# Altium PCB cProject.PcbDoc
Units mm, origin at the board's own origin, x right, y up, seen from the top; angles counter-clockwise.
Board outline 103.1 x 119.4 mm, 2 copper layers (Top Layer, Bottom Layer); 22 components, 9 nets, 45 pads, 0 vias.
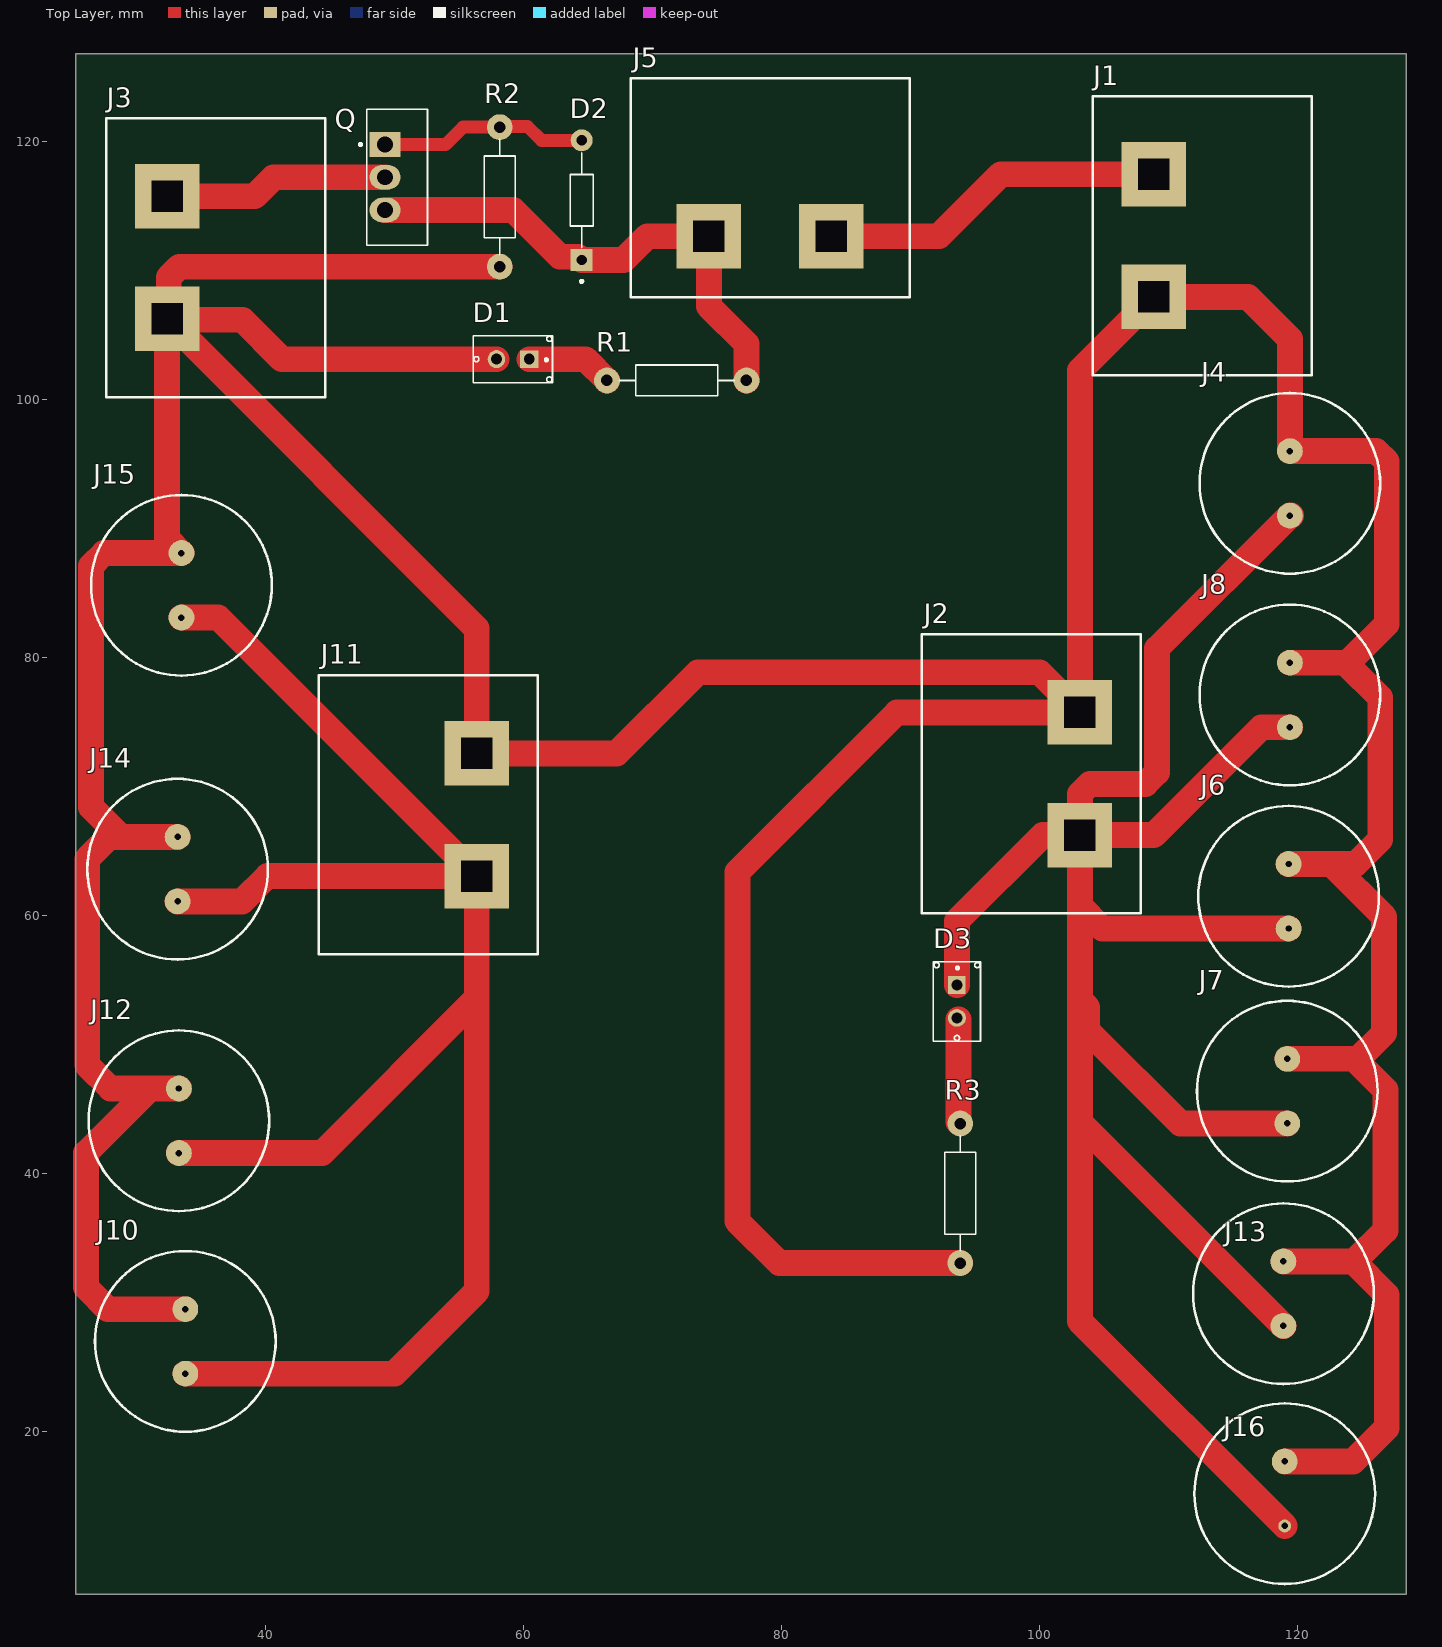
[diagram p0: Top Layer view]
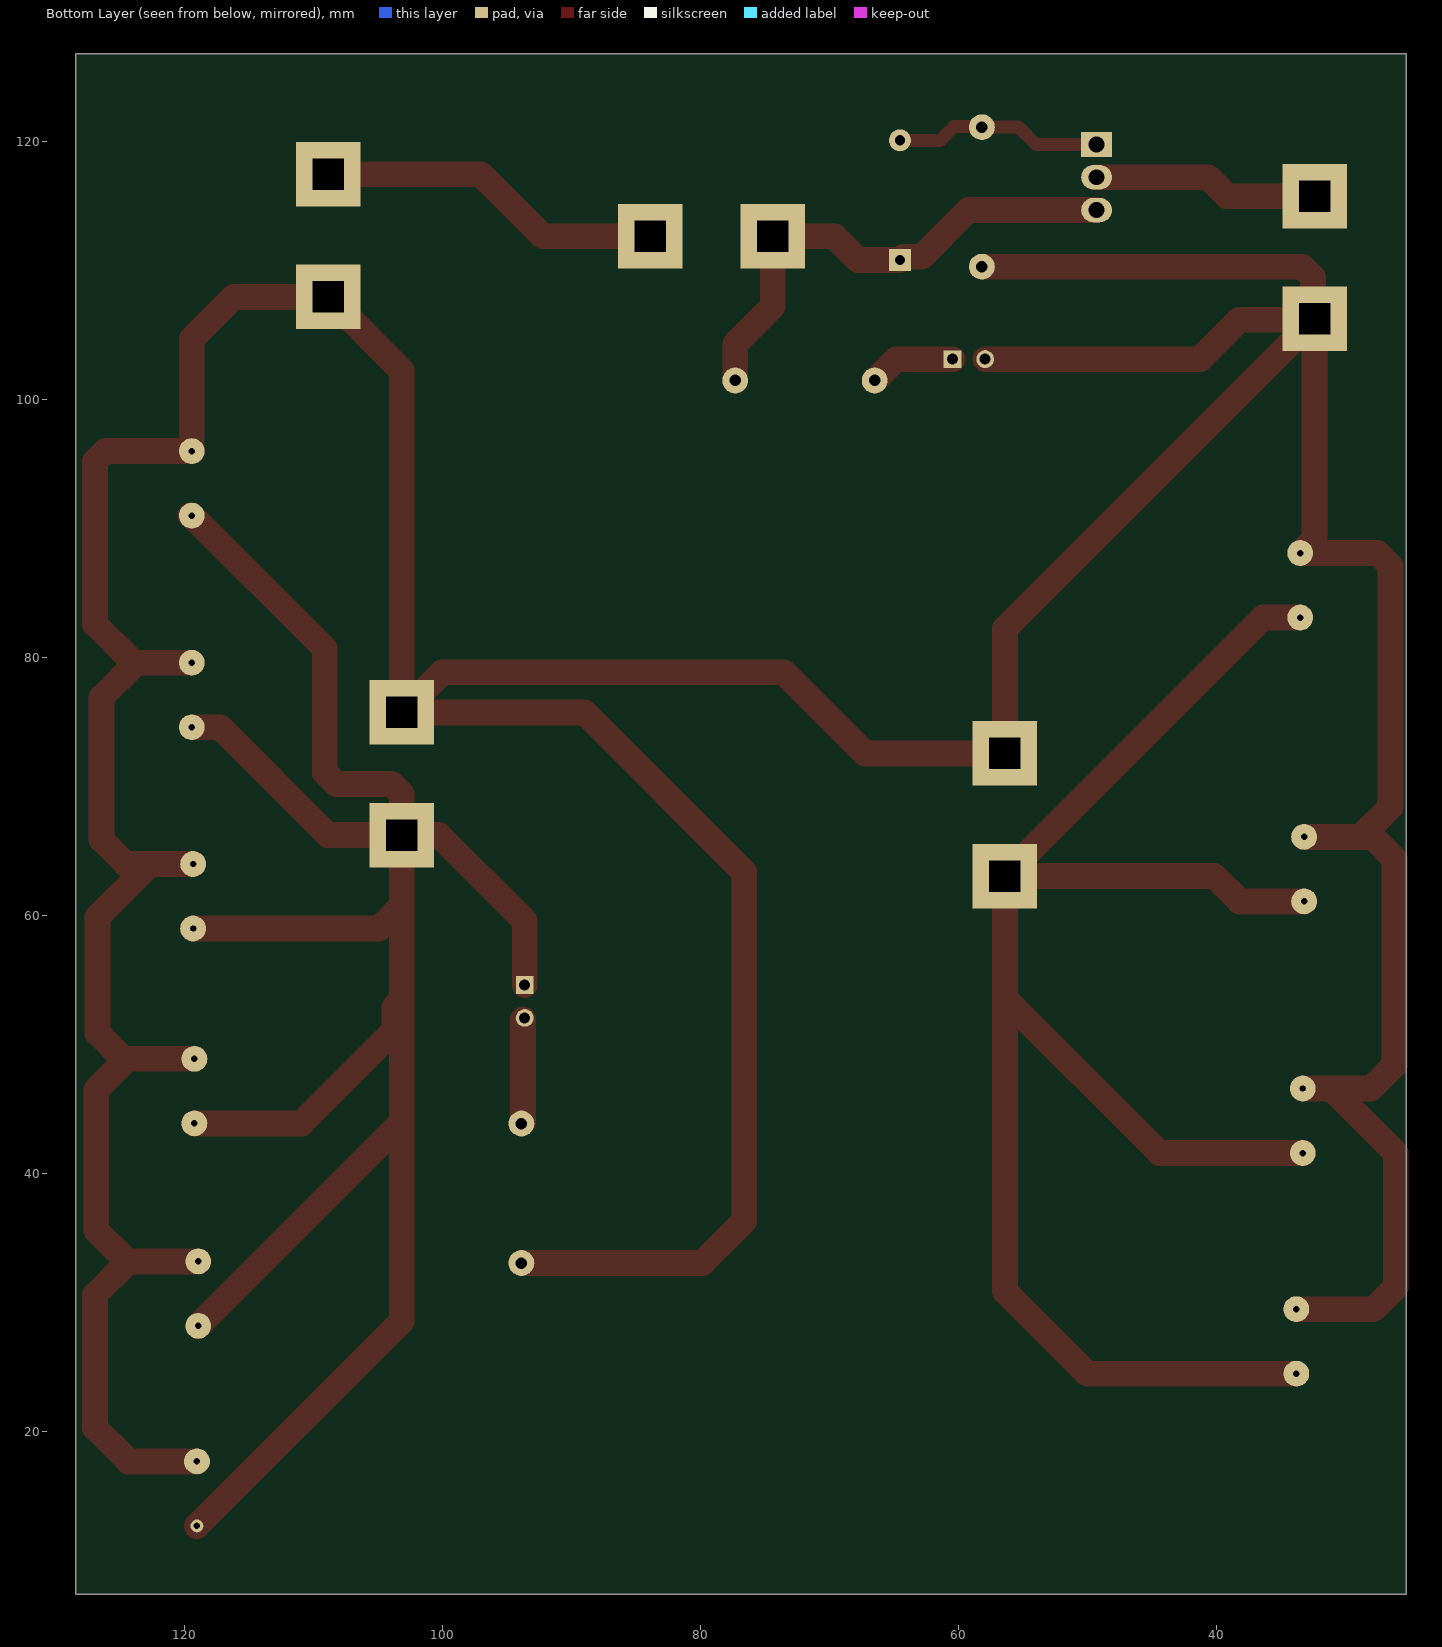
[diagram p1: Bottom Layer view, seen from below]
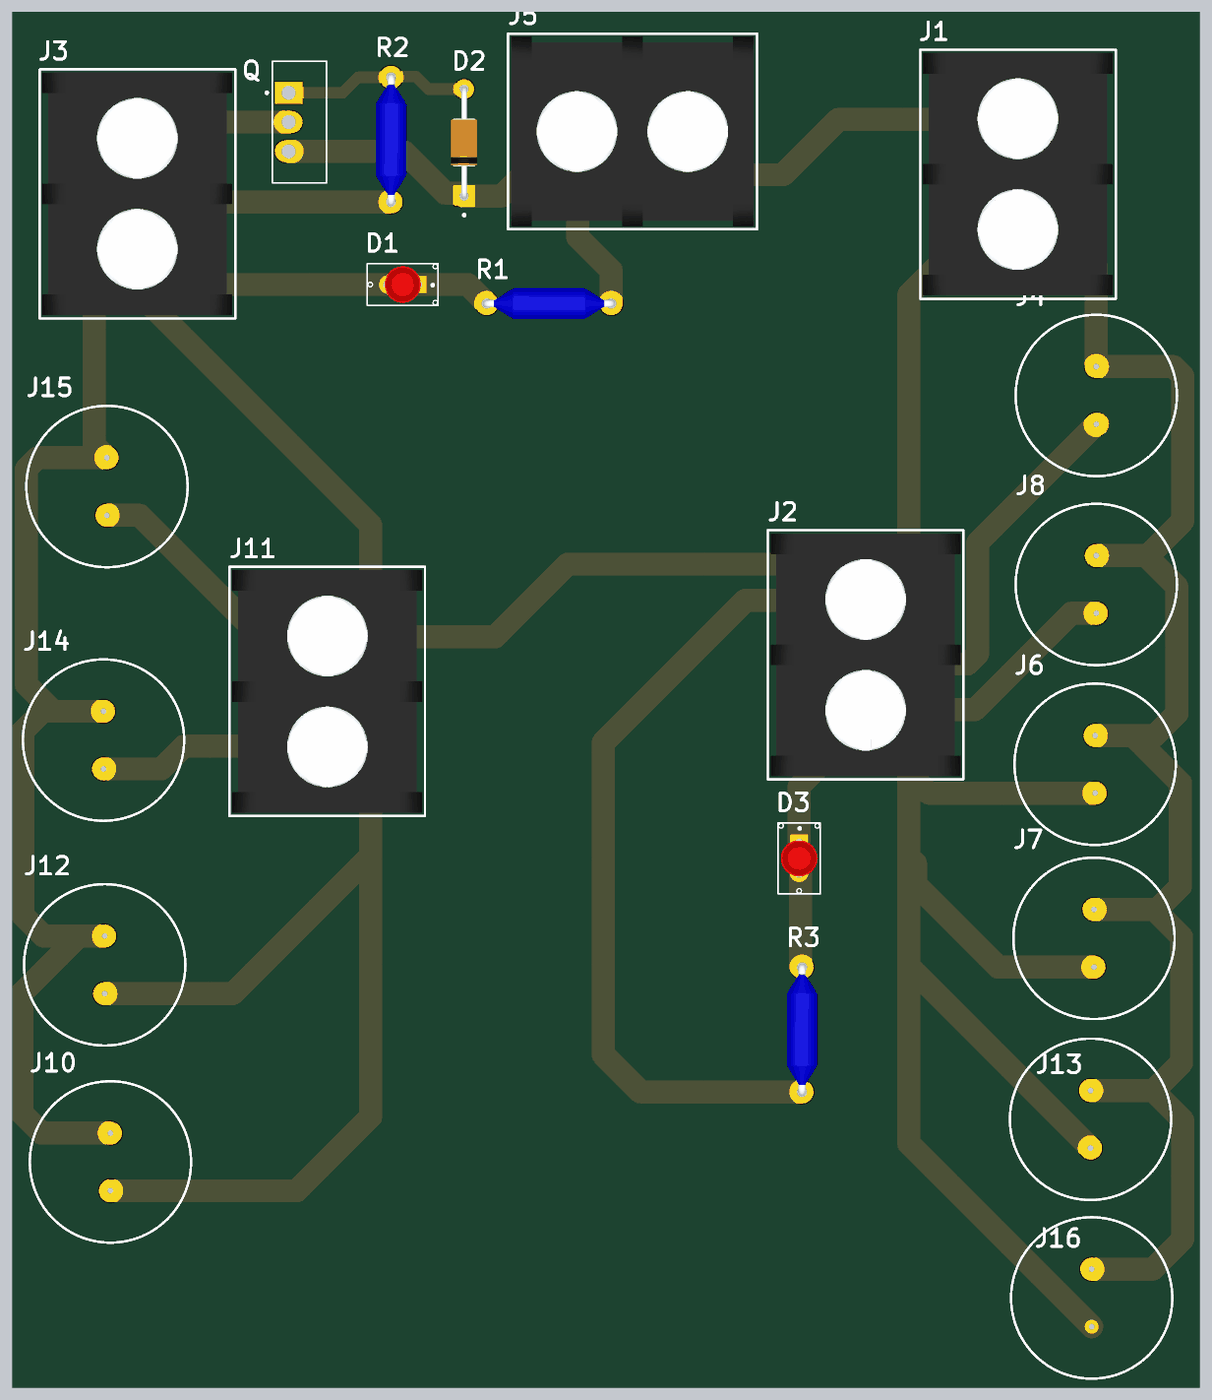
[diagram p2: 3D render of the assembled board from above, using the file's embedded part models]

## Layer stack, top to bottom
Top Solder: solder mask 0.0102, Solder Resist, Dk 3.5
Top Layer: signal copper 0.0356
Dielectric 1: dielectric 0.32, FR-4, Dk 4.8
Bottom Layer: signal copper 0.0356
Bottom Solder: solder mask 0.0102, Solder Resist, Dk 3.5

## Board outline
25.3,7.4 128.4,7.4 128.4,126.8 25.3,126.8

## Design rules (kind name [scope] priority, off if disabled: settings)
Clearance [All] p1: gap=0.254 ignorepadtopadclearanceinfootprint=FALSE
PolygonConnect [All] p1: connectstyle=Relief reliefconductorwidth=0.254 reliefentries=4 polygonreliefangle="90 Angle" airgapwidth=0.254
RoutingVias [All] p1: holewidth=0.711 width=1.27 viastyle="Through Hole" minholewidth=0.711 minwidth=1.27 maxholewidth=0.711 maxwidth=1.27
SolderMaskExpansion [All] p1: expansion=0.102 istentingtop=FALSE
Width [All] p1: maxlimit=0.254 minlimit=0.254 preferedwidth=0.254
30 further rules are at their usual default settings.

## Components (designator, comment, footprint, x,y, rotation, side; value= is the part's Value field where it differs from the comment)
D1 "RED LED" LED_SSL-LX4673GD-LA20 59.182,103.124 r180 top
D2 "Zener diode" DIOAD928W47L399D179 64.516,115.443 r90 top
D3 "RED LED" LED_SSL-LX4673GD-LA20 93.599,53.34 r270 top
J1 "B" "barrier terminal" 108.839,112.7 r270 top
J2 "B" "barrier terminal" 103.124,70.993 r90 top
J3 "B" "barrier terminal" 32.385,110.998 r270 top
J4 "ROZETTA GREEN 2 PIN" "ROZETTA 2 PIN"#1 119.4,93.5 r90 top
J5 "B" "barrier terminal" 79.121,112.649 r0 top
J6 "ROZETTA GREEN 2 PIN" "ROZETTA 2 PIN"#1 119.3,61.5 r90 top
J7 "ROZETTA GREEN 2 PIN" "ROZETTA 2 PIN"#1 119.2,46.4 r90 top
J8 "ROZETTA GREEN 2 PIN" "ROZETTA 2 PIN"#1 119.4,77.1 r90 top
J10 "ROZETTA GREEN 2 PIN" "ROZETTA 2 PIN"#1 33.8,27 r90 top
J11 "B" "barrier terminal" 56.388,67.818 r90 top
J12 "ROZETTA GREEN 2 PIN" "ROZETTA 2 PIN"#1 33.3,44.1 r90 top
J13 "ROZETTA GREEN 2 PIN" "ROZETTA 2 PIN"#1 118.9,30.7 r90 top
J14 "ROZETTA GREEN 2 PIN" "ROZETTA 2 PIN"#1 33.2,63.6 r90 top
J15 "ROZETTA GREEN 2 PIN" "ROZETTA 2 PIN"#1 33.5,85.6 r90 top
J16 "ROZETTA GREEN 2 PIN" "ROZETTA 2 PIN"#2 119,15.2 r90 top
Q "p mosfet" TO254P1054X469X2933-3 49.276,119.761 r270 top
R1 "resistor" RESAD1081W64L635D269 71.882,101.473 r180 top
R2 "resistor" RESAD1081W64L635D269 58.166,115.697 r90 top
R3 "resistor" RESAD1081W64L635D269 93.853,38.481 r270 top

## Footprints (in the part's own frame and the unit in brackets; to place one, negate y for a bottom-side part, rotate by r counter-clockwise, add the part's x,y. Pads: shape width x height; smd on the part's side, far side on the other; paste and mask are expansions set on the pad)
"barrier terminal" [mm]
  rect 5x5 hole 2.4 square: 1(-4.75,0) 2(4.75,0)
  silkscreen extent -10.8,-4.72 10.82,12.25, body extent -10.53,-4.5 10.53,12, height 18.5
DIOAD928W47L399D179 [mm]
  round 1.7 hole 0.8: A(4.64,0)
  rect 1.7x1.7 hole 0.8: C(-4.64,0)
  silkscreen extent -6.39,-0.89 3.67,0.89, body extent -4.87,-1.14 4.87,1.14, height 2.28
LED_SSL-LX4673GD-LA20 [mm]
  rect 1.4x1.358 hole 0.85: 1(-1.27,0)
  oval 1.358x1.4 hole 0.85: 2(1.27,0)
  silkscreen extent -3.08,-1.83 3.08,1.83, body extent -1.6,-1.59 1.6,1.59, height 8.89
RESAD1081W64L635D269 [mm]
  round 2 hole 0.89: 1(-5.405,0) 2(5.405,0)
  silkscreen extent -4.46,-1.19 4.46,1.19, body extent -5.72,-1.35 5.72,1.35, height 2.69
"ROZETTA 2 PIN"#1 [mm]
  round 2 hole 0.5: 1(-2.5,0) 2(2.5,0)
  silkscreen extent -7,-7 7,7
"ROZETTA 2 PIN"#2 [mm]
  round 1 hole 0.5: 1(-2.5,0)
  round 2 hole 0.5: 2(2.5,0)
  silkscreen extent -7,-7 7,7
TO254P1054X469X2933-3 [mm]
  rect 1.9x2.4 hole 1.23: 1(0,0)
  oval 1.9x2.4 hole 1.23: 2(2.54,0) 3(5.08,0)
  silkscreen extent -2.73,-2 7.81,3.29

## Part data
D2: Package=None, Availability=Unavailable, MP=BZX55B10, Price=None
J1 J2 J3 J5 J11: library part "barrier terminal", "1x2P Corner pin Barrier Block 2 1 9.5mm -40℃~+105℃ 32A 750V Black 12~22 Straight pin 4 Plugin,P=9.5mm Barrier Terminal Blocks ROHS", manufacturer=DORABO, manufacturer part number=DBT50G-9.5-2P, supplier part number=C395958, supplier=LCSC
Q: "P-Channel 100V 38A _Tc_ 3.1W _Ta_, 170W _Tc_ Surface Mount D2PAK", Package="TO-220 Infineon Technologies", Availability=Unavailable, MF="Infineon Technologies", MP=IRF5210, Price=None, SnapEDA_Link=https://www.snapeda.com/parts/IRF5210/Infineon%20Technologies/view-part/2777330/?ref=snap
R1 R2 R3: "Resistor,Metal Film, ERC-55 100K 1% T-2 RNC55H1003FR B14", Package="erc55 Vishay", Check_prices=https://www.snapeda.com/parts/RNC55H1003FRB14/Vishay/view-part/?ref=eda, MF=Vishay, MP=RNC55H1003FRB14, SnapEDA_Link=https://www.snapeda.com/parts/RNC55H1003FRB14/Vishay/view-part/?ref=snap

## Nets (pads, with @x,y where several pads share a name; then routed paths per layer and width w, separated by ;. In a path a pad name is that pad's centre, name@x,y a point inside that pad or via, vN(x,y) a via of type N, cw(c..) or ccw(c..) an arc to the next point about the centre after c; other vN are vias at no path point)
+5: D3.1 J2.1 J4.1 J6.1 J7.1 J8.1 J13.1 J16.1 | length 191.6
  Top Layer w2: D3.1 93.599,59.599 100.243,66.243 J2.1 ; J13.1 103.124,43.976 ; J16.1 103.124,28.576 103.124,43.976 ; J7.1 110.9,43.9 103.9,50.9 103.849,50.9 103.7,51.049 103.7,52.9 103.124,53.476 ; J6.1 104.876,59 103.124,60.752 ; J8.1 117.2,74.6 108.843,66.243 J2.1 ; J4.1@119.5,91 J4.1 109.1,80.7 109.1,71.1 108.2,70.2 103.9,70.2 103.124,69.424 J2.1 ; 103.124,43.976 103.124,53.476 ; 103.124,53.476 103.124,60.752 ; 103.124,60.752 J2.1
+12: J10.1 J11.1 J12.1 J14.1 J15.1 | length 140.7
  Top Layer w2: J14.1 38.2,61.1 40.168,63.068 J11.1 ; J12.1 44.4,41.6 56.388,53.588 ; J15.1 36.356,83.1 J11.1 ; J10.1 50,24.5 56.388,30.888 56.388,53.588 ; 56.388,53.588 J11.1
+12.1: J3.1 Q.2 | length 17.5
  Top Layer w2: J3.1 39.167,115.748 40.64,117.221 Q.2
GND: D1.2 J1.2 J2.2 J3.2 J4.2 J6.2 J7.2 J8.2 J10.2 J11.2 J12.2 J13.2 J14.2 J15.2 J16.2 R2.1 R3.2 | length 509.3
  Top Layer w2: J14.2 28.8,66.1 ; J12.2 31.1,46.6 ; J10.2 27.8,29.5 26.1,31.2 26.1,41.6 31.1,46.6 ; D1.2 41.275,103.124 38.227,106.172 J3.2@32.461,106.172 ; R2.1 33.33,110.292 32.512,109.474 32.512,106.375 J3.2 ; R3.2 79.827,33.076 76.581,36.322 76.581,63.373 88.951,75.743 J2.2 ; J13.2 124.3,33.2 ; J16.2 124.3,17.7 126.9,20.3 126.9,30.6 124.3,33.2 ; J7.2 124.4,48.9 ; J6.2 122.6,64 ; J8.2 123.7,79.6 ; 28.8,66.1 27.9,66.1 26.2,64.4 26.2,48.4 28,46.6 31.1,46.6 ; 28.8,66.1 26.5,68.4 26.5,87.1 27.5,88.1 J15.2 32.385,89.215 J3.2 ; J3.2 J3.2@32.461,106.172 ; J3.2@32.461,106.172 56.388,82.245 J11.2 67.234,72.568 73.533,78.867 100,78.867 J2.2 ; J2.2 103.124,102.235 J1.2 116.15,107.95 119.4,104.7 J4.2 126.1,96 126.9,95.2 126.9,82.6 123.9,79.6 123.7,79.6 ; 122.6,64 124.5,64 126.4,65.9 126.4,76.9 123.7,79.6 ; 122.6,64 126.7,59.9 126.7,50.9 124.7,48.9 124.4,48.9 ; 124.3,33.2 124.4,33.2 126.8,35.6 126.8,46.5 124.4,48.9
NetD1_1: D1.1 R1.2 | length 6.7
  Top Layer w2: D1.1 64.826,103.124 R1.2
NetD2_A: D2.A Q.1 R2.2 | length 16.3
  Top Layer w1: Q.1 53.975,119.761 55.316,121.102 R2.2 58.222,121.158 60.325,121.158 61.4,120.083 D2.A
NetD3_2: D3.2 R3.1 | length 8.3
  Top Layer w1: D3.2 D3.2@93.726,51.943 ; R3.1@93.726,44.013 R3.1
  Top Layer w2: R3.1@93.726,44.013 D3.2@93.726,51.943
Vfuse: D2.C J5.1 Q.3 R1.1 | length 39.8
  Top Layer w2: Q.3 59.219,114.681 62.837,111.063 64.256,111.063 D2.C 67.75,110.803 69.596,112.649 J5.1 74.371,107.239 77.287,104.323 R1.1
Vout: J1.1 J5.2 | length 27
  Top Layer w2: J5.2 92.202,112.649 97.003,117.45 J1.1

## Silkscreen, mask and mechanical layers (free items; w line width, h text height)
Drill Guide:
  lines w0.2: 128.4,7.4 25.3,7.4 25.3,126.8 125.5,126.8 128.4,126.8
  lines w0.245: 128.4,7.4 128.4,25.3 128.4,126.8